# Altium PCB PCB1.PcbDoc (part 2 of 2)
Units mm, origin at the board's own origin, x right, y up, seen from the top; angles counter-clockwise.
Board outline 92.01 x 103.4 mm, 2 copper layers (Top Layer, Bottom Layer), stack 1.569 mm thick; 57 components, 56 nets, 293 pads, 87 vias.
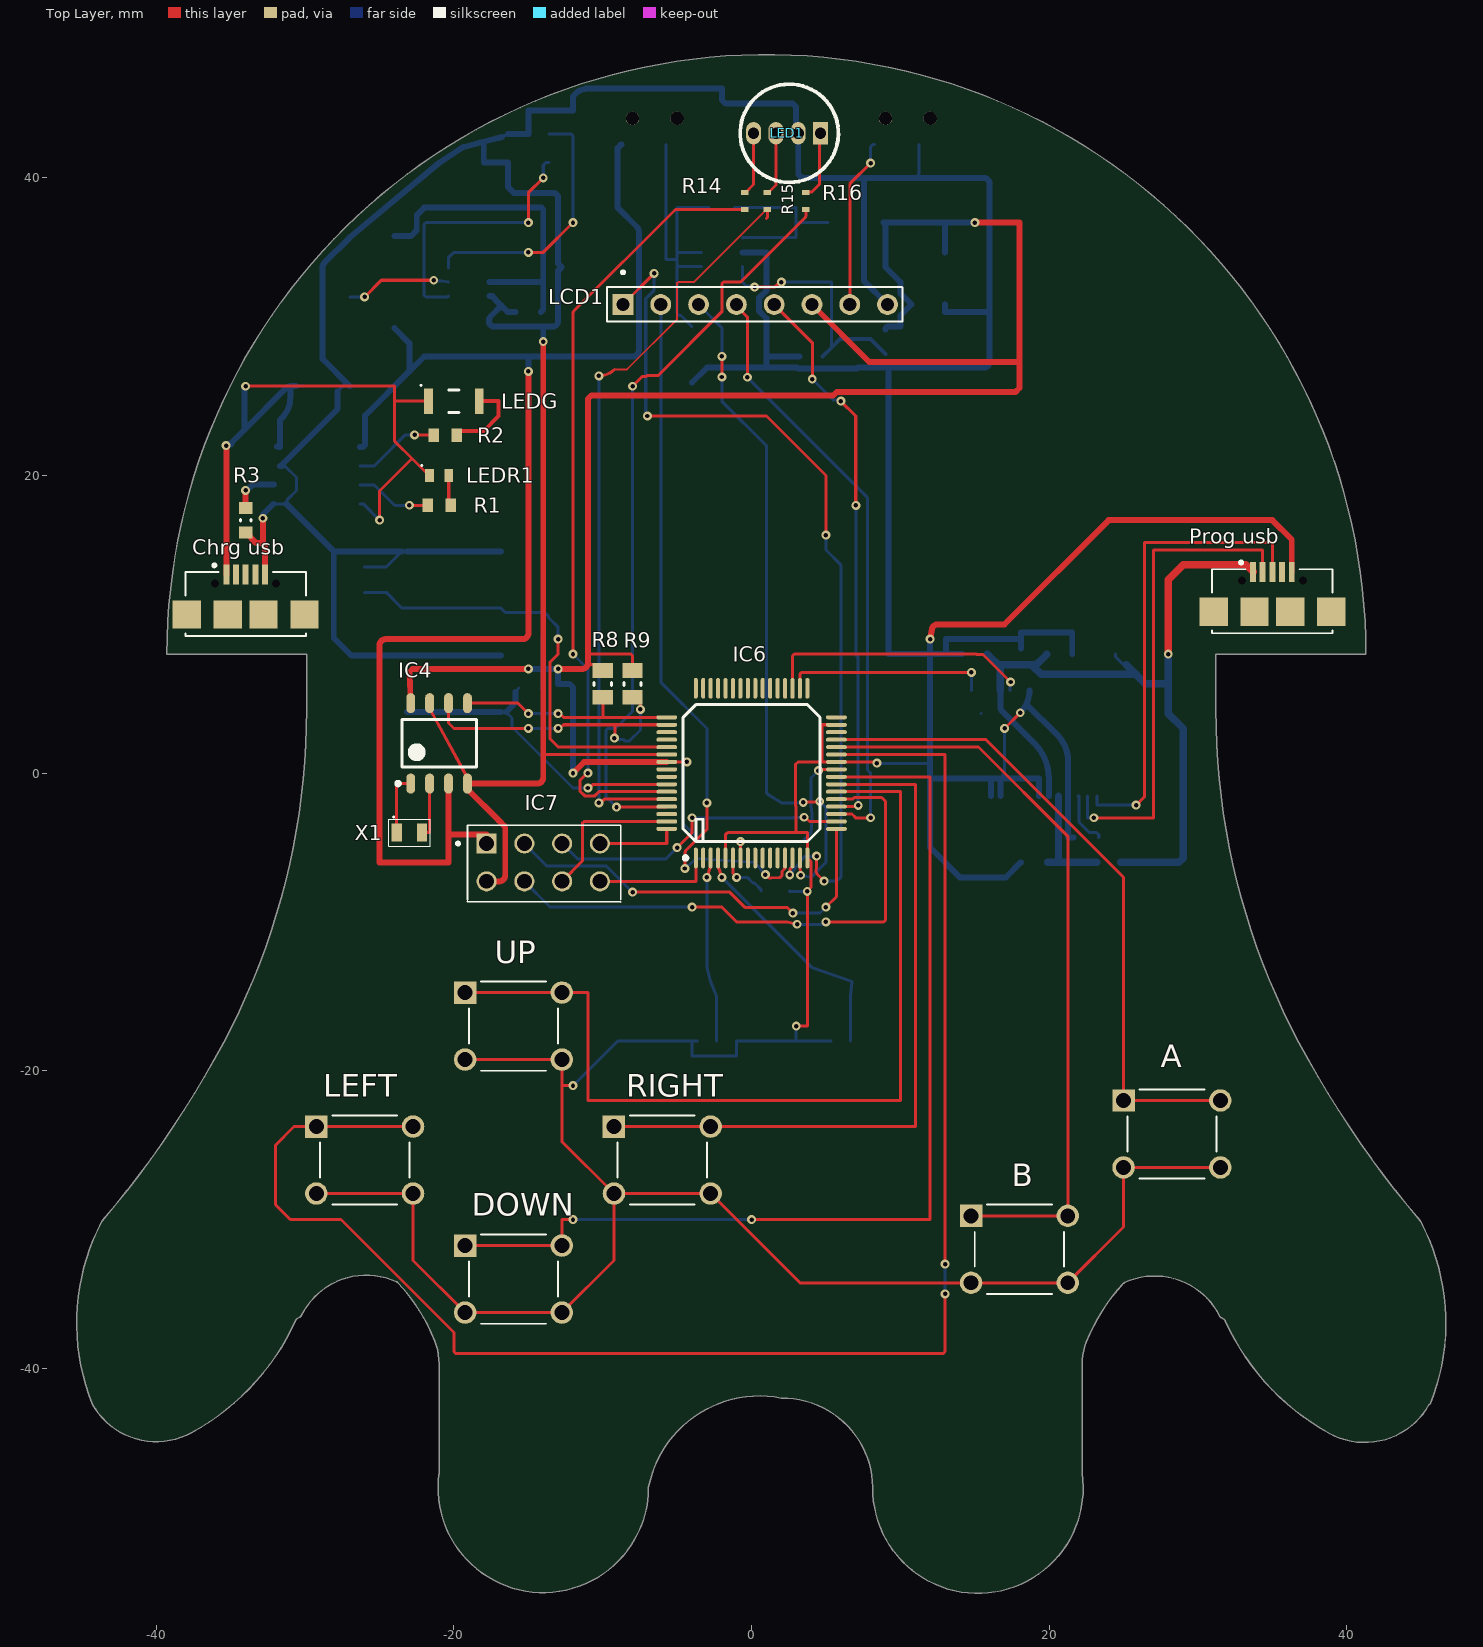
[diagram p0: Top Layer view]

## Part data (continued)
R10: library part RC0805FR-0710KL, "Res SMD 0805 10K 1% 0.125W T.C.100PPM", Case Code (Imperial)=0805, Case Code (Metric)=2012, Manufacturer=Yageo, Max Operating Temperature=155°C, Max Power Dissipation=125mW, Min Operating Temperature=-55°C, Package Quantity=1, Resistance=10kR, Resistance Tolerance=1%, Resistor Type="Thick Film", Supplier Part Number 1=6185163, Temperature Coefficient=100ppm/°C, Voltage Rating=150V, Case/Package=0805, Category=Resistors, ComponentLink1Description=https://datasheet.ciiva.com/11808/0900766b8106beab-11808151.pdf?src-supplier=RSComponents, ComponentLink1URL=https://datasheet.ciiva.com/11808/0900766b8106beab-11808151.pdf?src-supplier=RSComponents, ComponentLink2Description=https://datasheet.ciiva.com/12669/rc0805-12669688.pdf?src-supplier=Mouser, ComponentLink2URL=https://datasheet.ciiva.com/12669/rc0805-12669688.pdf?src-supplier=Mouser, ComponentLink3Description=https://datasheet.ciiva.com/46447/444164-46447563.pdf?src-supplier=Element14, ComponentLink3URL=https://datasheet.ciiva.com/46447/444164-46447563.pdf?src-supplier=Element14, ComponentLink4Description=https://datasheet.ciiva.com/2456/pyu-r-int-thick-7-2456972.pdf?src-supplier=Digi-Key, ComponentLink4URL=https://datasheet.ciiva.com/2456/pyu-r-int-thick-7-2456972.pdf?src-supplier=Digi-Key, ComponentLink5Description=https://datasheet.ciiva.com/2456/pyu-r-int-thick-7-2456973.pdf?src-supplier=Digi-Key, ComponentLink5URL=https://datasheet.ciiva.com/2456/pyu-r-int-thick-7-2456973.pdf?src-supplier=Digi-Key, ComponentLink6Description=https://datasheet.ciiva.com/2456/pyu-r-int-thick-7-2456974.pdf?src-supplier=Digi-Key, ComponentLink6URL=https://datasheet.ciiva.com/2456/pyu-r-int-thick-7-2456974.pdf?src-supplier=Digi-Key, ComponentLink7Description=https://datasheet.ciiva.com/16747/rc0805-16747087.pdf?src-supplier=Future+Electronics, ComponentLink7URL=https://datasheet.ciiva.com/16747/rc0805-16747087.pdf?src-supplier=Future+Electronics, Construction=Rectangular, Depth=1.25mm, Features="Moisture Resistant", Height=0.024inch, Lead Free="Lead Free", Length=2mm, Manufacturer Part Number=RC0805FR-0710KL, Military Standard=Not, Number of Terminations=2, Packaging="Tape and Reel", Power Rating=125mW, Pricing 1="5000=0,00700 (USD)", REACH SVHC=Unknown, RoHS=Yes, RoHS Compliant=Yes, Series=RC, Size Code=0805, Stock 1=435000, Supplier 1=RSComponents, Technology="THICK FILM", Termination=SMD/SMT, Tolerance=1%, Width=0.049inch
R11 R12 R13: library part PCF0603P-R-4K7-BT1, "Surface Mount Metal Film Resistor, Pcf Series, 4.7 Kohm, 63 Mw, - 0.1%, 75 V Rohs Compliant: Yes", Case Code (Imperial)=0603, Case Code (Metric)=1608, Manufacturer="TT Welwyn", Power Rating=63mW, Resistance=4.7kR, Resistor Type="Thin Film", Supplier Part Number 1=61M8292, Temperature Coefficient=25ppm/°C, Tolerance=0.1%, Voltage Rating=75V, Case/Category=0603, Category="Chip SMD Resistors", ComponentLink1Description=https://datasheet.ciiva.com/7860/3754-7860191.pdf?src-supplier=Element14, ComponentLink1URL=https://datasheet.ciiva.com/7860/3754-7860191.pdf?src-supplier=Element14, ComponentLink2Description=https://datasheet.ciiva.com/6093/3754-6093381.pdf?src-supplier=Farnell, ComponentLink2URL=https://datasheet.ciiva.com/6093/3754-6093381.pdf?src-supplier=Farnell, Manufacturer Part Number=PCF0603P-R-4K7-BT1, Packaging="Cut Tape", Pricing 1="10=0,17900 (USD)", REACH SVHC="No SVHC", RoHS=Yes, Stock 1=1027, Supplier 1=Newark, Voltage Rating (DC)=75V
R14 R15 R16: library part CRG0402F270R, "Res Thick Film 0402 270 Ohm 1% 0.063W(1/16W) ±100ppm/C Pad SMD T/R", Case Code (Imperial)=0402, Case Code (Metric)=1005, Manufacturer="TE Connectivity", Max Operating Temperature=125°C, Max Power Dissipation=63mW, Min Operating Temperature=-55°C, Number of Resistors=1, Package Quantity=10000, Resistance Tolerance=1%, Resistor Type="Thick Film", Supplier Part Number 1=95W7454, Temperature Coefficient=100ppm/°C, Voltage Rating=50V, Case/Package=0402, Category="Chip SMD Resistors", ComponentLink1Description=https://datasheet.ciiva.com/11811/0900766b80d0914d-11811952.pdf?src-supplier=RSComponents, ComponentLink1URL=https://datasheet.ciiva.com/11811/0900766b80d0914d-11811952.pdf?src-supplier=RSComponents, ComponentLink2Description=https://datasheet.ciiva.com/12563/eng-ds-1773204-g-12563015.pdf?src-supplier=Mouser, ComponentLink2URL=https://datasheet.ciiva.com/12563/eng-ds-1773204-g-12563015.pdf?src-supplier=Mouser, ComponentLink3Description=https://datasheet.ciiva.com/22706/1610603-22706089.pdf?src-supplier=Element14, ComponentLink3URL=https://datasheet.ciiva.com/22706/1610603-22706089.pdf?src-supplier=Element14, ComponentLink4Description=https://datasheet.ciiva.com/17122/70063020-17122922.pdf?src-supplier=Allied+Electronics, ComponentLink4URL=https://datasheet.ciiva.com/17122/70063020-17122922.pdf?src-supplier=Allied+Electronics, Depth=0.5mm, ELV=Compliant, Height=0.35mm, Length=1mm, Manufacturer Part Number=CRG0402F270R, Mount="Surface Mount", Number of Terminations=2, Packaging="Tape and Reel", Power Rating=63mW, Pricing 1="1=0,00500, 10=0,00400, 25=0,00400, 50=0,00400, 100=0,00400 (USD)", REACH SVHC="No SVHC", Resistance=270R, RoHS=Yes, RoHS Compliant=Yes, Series="CRG, Neohm", Stock 1=50238, Supplier 1=Newark, Technology="THICK FILM", Termination=Solder, Tolerance=1%, Voltage Rating (DC)=50V, Weight=2.3E-05oz, Width=0.5mm
SW1 SW10: library part SK12D07VG3NS, "C&K SK-12D07-VG 3 NS Switches > Slide > Miniature > Mini R/A Slide", Manufacturer="ITT C&K", Package Quantity=1000, Supplier Part Number 1=SK12D07VG3NS-ND, Category=Uncategorized, ComponentLink1Description=http://www.mouser.com/ds/2/60/sk-965380.pdf?src-supplier=Mouser, ComponentLink1URL=http://www.mouser.com/ds/2/60/sk-965380.pdf?src-supplier=Mouser, ComponentLink2Description=https://www.ckswitches.com/media/1432/sk.pdf?src-supplier=Digi-Key, ComponentLink2URL=https://www.ckswitches.com/media/1432/sk.pdf?src-supplier=Digi-Key, Manufacturer Part Number=SK12D07VG3NS, Pricing 1="30000=0,24375 (USD)", RoHS=No, Supplier 1=Digi-Key
SW8 SW9: library part EVQ-PLMA15, "Switch Tactile N.O. SPST Round Button J-Bend 0.02A 15VDC 2.6N SMD Embossed Tape", Contact Current Rating=20mA, Contact Resistance=50mR, Insulation Resistance=50MR, Manufacturer=Panasonic, Max Operating Temperature=70°C, Max Voltage Rating (DC)=15V, Min Operating Temperature=-20°C, Operating Force=2.6N, Package Quantity=1, Supplier Part Number 1=27AC5577, Actuator Length=0.3mm, Actuator Type=Standard, Category="Tactile Switches", ComponentLink1Description=https://datasheet.ciiva.com/8164/atv0000ce2-8164994.pdf?src-supplier=Avnet, ComponentLink1URL=https://datasheet.ciiva.com/8164/atv0000ce2-8164994.pdf?src-supplier=Avnet, ComponentLink2Description=https://datasheet.ciiva.com/16205/atk0000ce3-16205767.pdf?src-supplier=Future+Electronics, ComponentLink2URL=https://datasheet.ciiva.com/16205/atk0000ce3-16205767.pdf?src-supplier=Future+Electronics, ComponentLink3Description=https://datasheet.ciiva.com/17065/70270715-17065721.pdf?src-supplier=Allied+Electronics, ComponentLink3URL=https://datasheet.ciiva.com/17065/70270715-17065721.pdf?src-supplier=Allied+Electronics, ComponentLink4Description=https://datasheet.ciiva.com/2899/atk0000ce3-2899834.pdf?src-supplier=Digi-Key, ComponentLink4URL=https://datasheet.ciiva.com/2899/atk0000ce3-2899834.pdf?src-supplier=Digi-Key, ComponentLink5Description=https://datasheet.ciiva.com/2899/atk0000ce3-2899835.pdf?src-supplier=Digi-Key, ComponentLink5URL=https://datasheet.ciiva.com/2899/atk0000ce3-2899835.pdf?src-supplier=Digi-Key, ComponentLink6Description=https://datasheet.ciiva.com/2899/atk0000ce3-2899836.pdf?src-supplier=Digi-Key, ComponentLink6URL=https://datasheet.ciiva.com/2899/atk0000ce3-2899836.pdf?src-supplier=Digi-Key, ComponentLink7Description=https://datasheet.ciiva.com/26827/getdatasheetpartid-51835-26827884.pdf?src-supplier=Verical, ComponentLink7URL=https://datasheet.ciiva.com/26827/getdatasheetpartid-51835-26827884.pdf?src-supplier=Verical, Contact Plating=Gold,Silver, Current Rating=20mA, Depth=4.9mm, Electrical Life=200000Cycles, Height=1.5mm, Illumination Type=Non-Illuminated,Illuminated, Lead Free="Lead Free", Length=4.9mm, Manufacturer Part Number=EVQ-PLMA15, Max Current Rating=20mA, Mechanical Life=200000Cycles, Mount="Surface Mount", Orientation=Straight, Packaging="Tape and Reel", Pricing 1="1=0,18600, 5000=0,18600, 10000=0,18000, 25000=0,17700, 50000=0,17500 (USD)", Radiation Hardening=No, REACH SVHC="No SVHC", RoHS=Yes, Stock 1=5000, Supplier 1=Newark, Switch Function=Off-Mom, Switch Travel=0.25mm, Termination=J-Bend, Throw Configuration=SPST, Voltage Rating=15V, Voltage Rating (DC)=15V, Width=4.9mm
X1: library part "X1A0000610003 FC-12M 32.768KHZ 12.5PF", "Crystal, FC-12M, 32.768 Khz, 12.5 Pf", Capacitance=1.25E-11F, Frequency=32.768kHz, Load Capacitance=12.5pF, Manufacturer=Epson, Max Operating Temperature=85°C, Min Operating Temperature=-40°C, Supplier Part Number 1=1907468, ComponentLink1Description=https://datasheet.ciiva.com/48778/1734644-48778297.pdf?src-supplier=Element14, ComponentLink1URL=https://datasheet.ciiva.com/48778/1734644-48778297.pdf?src-supplier=Element14, ComponentLink2Description=https://datasheet.ciiva.com/48778/1734644-48778536.pdf?src-supplier=Element14, ComponentLink2URL=https://datasheet.ciiva.com/48778/1734644-48778536.pdf?src-supplier=Element14, ComponentLink3Description=https://datasheet.ciiva.com/48778/1734644-48778057.pdf?src-supplier=Element14, ComponentLink3URL=https://datasheet.ciiva.com/48778/1734644-48778057.pdf?src-supplier=Element14, Manufacturer Part Number="X1A0000610003 FC-12M 32.768KHZ 12.5PF", Mount="Surface Mount", Number of Pins=2, Packaging="Cut Tape", Pricing 1="1=1,08000, 50=0,92000, 100=0,87600, 250=0,81700, 500=0,77000 (GBP)", REACH SVHC=Unknown, RoHS=Yes, Stock 1=2323, Supplier 1=Farnell
X2: library part HC49SM-11.0592-30-50-60-16-ATF, "Crystal 11.0592MHz 16pF 2-Pin HC-49/U Loose", Case/Package=SMD/SMT, Frequency Stability=50ppm, Frequency Tolerance=30ppm, Load Capacitance=16pF, Manufacturer=Multicomp, Max Operating Temperature=60°C, Min Operating Temperature=-10°C, Supplier Part Number 1=33P6975, Accuracy=30ppm, Category=Crystals, ComponentLink1Description=https://datasheet.ciiva.com/8049/1661828-8049574.pdf?src-supplier=Element14, ComponentLink1URL=https://datasheet.ciiva.com/8049/1661828-8049574.pdf?src-supplier=Element14, ComponentLink2Description=https://datasheet.ciiva.com/22697/1661828-22697926.pdf?src-supplier=Element14, ComponentLink2URL=https://datasheet.ciiva.com/22697/1661828-22697926.pdf?src-supplier=Element14, Frequency=11.0592MHz, Manufacturer Part Number=HC49SM-11.0592-30-50-60-16-ATF, Mount="Surface Mount", Number of Pins=2, Packaging="Cut Tape", Pricing 1="1=0,35400, 10=0,34000, 50=0,31600, 100=0,28300, 250=0,26100, 500=0,24300 (USD)", REACH SVHC="No SVHC", RoHS=Yes, Stock 1=597, Supplier 1=Newark

## Via types
v1: diameter 0.6, hole 0.3, Top Layer to Bottom Layer, 87 vias

## Nets (pads, with @x,y where several pads share a name; then routed paths per layer and width w, separated by ;. In a path a pad name is that pad's centre, name@x,y a point inside that pad or via, vN(x,y) a via of type N, cw(c..) or ccw(c..) an arc to the next point about the centre after c; other vN are vias at no path point)
+5V: "Prog usb.1" C8.1 C9.1 C10.2 IC5.4 IC5.20 R11.2 | length 56.2
  Top Layer w0.5: v1(28,8) 28,13 29,14 33.225,14 33.7,13.525
  Bottom Layer w0.203: 16.725,4.358 ccw(c16.928,4.359) 16.784,4.216 ; C10.2 24.45,7.825 24.998,7.277 25.173,7.277
  Bottom Layer w0.403: 16.725,4.358 IC5.4 ; 16.784,4.216 18.999,2.001 cw(c16.646,-0.354) 19.975,-0.354 ; IC5.20 19.975,-0.355
  Bottom Layer w0.5: C8.1@15.85,7.962 C8.1 ; C8.1@15.851,7.962 cw(c15.629,7.514) 15.983,7.867 16.578,7.272 ; IC5.4 16.725,7.125 ccw(c16.371,6.771) 16.724,7.126 16.579,7.271 ccw(c16.225,6.918) 16.578,7.272 ; 19.122,7.272 16.725,7.272 16.578,7.272 ; C9.1@19.85,8 18.975,7.125 19.456,6.644 25.806,6.644 ; R11.2 27,-6 28.707,-6 29,-5.707 29,3 28,4 v1(28,8) ; 25.173,7.277 25.806,6.644 ; 25.856,6.644 25.806,6.644 ; 28,6 26.45,6 25.806,6.644
GND: "Chrg usb.5" "Prog usb.5" A.3 A.4 B.3 B.4 BAT.2 C1.2 C2.2 C3.2 C4.2 C5.2 C6.2 C7.2 C8.2 C9.2 C10.1 C11.2 C12.2 DOWN.3 DOWN.4 IC1.1 IC1.3 IC2.6 IC3.2 IC4.4 IC4.7 IC5.7 IC5.18 IC5.21 IC5.25 IC5.26 IC6.5 IC6.16 IC6.26 IC6.31 IC6.54 IC7.2 LCD1.8 LED1.2 LEFT.3 LEFT.4 Q1.1 Q1.3 R3.1 R5.1 R7.1 R10.1 RIGHT.3 RIGHT.4 SW8.3 SW8.4 SW9.3 SW9.4 SW10.2 UP.3 UP.4 | length 539.7
  Top Layer w0.203: LEFT.3 LEFT.4 -22.75,-32.75 DOWN.3 DOWN.4 -9.25,-32.75 RIGHT.3 ; IC4.7 -21.635,4.325 -19.095,-0.325 IC4.4 IC4.4@-19.095,-1.075 ; UP.3 UP.4 -12.75,-21 ; -16.614,-3.556 cw(c-16.758,-3.699) -16.555,-3.699 ; -14,1.25 IC6.54 ; v1(-12,-21) -12.75,-21 ; IC6.5 -1.75,-4.202 cw(c-1.547,-4.203) -1.548,-4 3,-4 ; v1(3,-17) 3.75,-17 v1@3.75,-7.95 ; v1(3.743,-7.95) 4,-7.693 4,-5.95 3.94,-5.89 IC6.16 3.75,-4 3,-4 ; IC6.31 4.725,3.25 4.725,0.75 ; v1(8.425,0.676) 8.364,0.737 5.713,0.737 IC6.26 4.725,0.75 ; v1(17,3) v1(18.056,4.056) ; A.4 A.3 25,-30.5 B.4 B.3 3.25,-34.25 RIGHT.4 RIGHT.3 ; -12.75,-21 -12.75,-24.75 RIGHT.3 ; 3,-4 3,-2.238 2.943,-2.181 2.943,0.574 3.119,0.75 4.725,0.75
  Top Layer w0.4: IC4.4@-19.095,-1.075 -17,-3.17 -16.614,-3.556 ; IC4.4 -14.4,-0.7 ccw(c-14.4,-0.3) -14,-0.3 -14,1.25 v1(-14,29) ; IC7.2 -16.955,-7.27 ccw(c-16.955,-6.87) -16.555,-6.87 -16.555,-3.699 ; v1(12,9) 12.118,9.669 cw(c12.512,9.6) 12.512,10 17,10 24,17 35,17 36.3,15.7 36.3,13.525
  Top Layer w0.403: R3.1 -33.276,15.451 -32.844,15.451 ; v1(-32.844,17.129) -32.844,15.451 ; -32.7,13.337 -32.7,15.307 -32.844,15.451
  Bottom Layer w0.203: IC1.1@-32.125,18.095 IC1.1 IC1.1@-31.439,18.095 ; IC1.3@-31.344,20.635 -31.353,20.635 -31.348,20.631 -30.581,19.863 -30.581,18.993 -31.209,18.366 -31.209,18.255 -31.369,18.095 IC1.1@-31.439,18.095 ; IC1.1@-31.275,18.095 IC1.1@-31.439,18.095 ; C1.2@-27.823,25.652 -27.475,26 C1.2 ; C12.2 -24.55,13.85 -23.5,14.9 SW9.3 ; Q1.3@-16.773,42.752 Q1.3 ; v1(-12,-21) -9,-18 -4,-18 ; -10.198,45.964 -10.161,46 ; C5.2 -4,-18 ; C11.2 2.557,-7.95 v1(3.743,-7.95) ; v1(3,-17) 3,-18 ; C6.2 3,-18 ; v1(8.425,0.676) 8.45,0.65 12,0.65 12,0.644 ; 11,40 11.25,40.25 SW10.2 ; 12,-0.354 12,-0.31 ; 16.725,-0.354 ccw(c16.061,0.31) 17,0.31 v1(17,3) ; -4,-18 -4,-19 -1,-19 -1,-18 3,-18
  Bottom Layer w0.4: IC1.1@-31.275,18.095 -28.08,14.9 ; C1.2 -28.825,27.825 R5.1 -28.825,34.011 cw(c-28.425,34.009) -28.709,34.291 -27.013,35.987 cw(c-26.73,35.704) -26.986,36.012 -21,41 -19.434,42.046 -19.37,42.063 -18.074,42.407 ; SW9.3@-23.5,14.9 -28.08,14.9 ; SW9.3 SW9.4 ; -18.205,42.372 -18.074,42.407 ; -18,42.372 -18,41.05 Q1.1 -16.375,39.398 -15.977,39 -13.234,39 -13,38.766 -13,34.234 -12.766,34 -13,33.766 -13,30.4 cw(c-13.4,30.4) -13.399,30 -14,30 ; IC2.6 -17.425,32.05 -17.227,31.852 -17.227,31.822 -16.816,31.411 ; -17.054,42.677 -18.013,42.423 ; -17.014,42.688 Q1.3@-16.773,42.752 ; SW8.4 SW8.3 -26.9,7.9 -28.08,9.08 -28.08,14.9 ; Q1.3 -15,42.95 -15,44.54 -12,44.54 -12,45.48 -11.702,45.778 cw(c-11.419,45.495) -11.554,45.872 -11.525,45.882 cw(c-11.39,45.505) -11.506,45.888 -11.193,45.983 cw(c-11.078,45.6) -11.078,46 -10.161,46 -2,46 -2,45.234 -1.766,45 2.766,45 3,44.766 3,43.784 3.02,43.764 LED1.2@3.02,43 ; C2.2 -16.405,31 -16.816,31.411 ; v1(-14,29) -14,30 ; C3.2 -3,27.25 1,27.25 ; IC3.2 1,35 1,32.421 0.493,31.913 0.493,31.063 1,30.556 1,28 ; LED1.2@3.135,43 3.135,40.234 3.369,40 7.565,40 ; R7.1 1,28 ; LCD1.8 7.565,33.062 7.565,40 ; 12,-0.354 16.075,-0.354 ; 12,8 9.206,8 9.206,27.25 ; C4.2 13,31 16,31 ; 13.075,8 13.075,9 18.103,9 ; IC5.26 16.075,-0.354 ; IC5.25 16.725,-0.354 ; C9.2 18.103,9 ; IC5.21 19.325,-0.354 16.725,-0.354 ; C10.1 21.55,9.459 18.103,9.459 18.103,9 ; -18.074,42.407 -18.013,42.423 ; -18.074,42.407 -18.013,42.423 ; -16.816,31.411 -17.544,30.683 ccw(c-17.261,30.4) -17.261,30 -14,30 ; 1,27.25 3.052,27.25 3.125,27.177 7.082,27.177 7.155,27.25 9.206,27.25 ; 1,27.25 1,28 ; 7.565,40 11,40 15.6,40 cw(c15.6,39.6) 16,39.601 16,31 ; 9.206,27.25 15.6,27.25 ccw(c15.6,27.65) 16,27.65 16,31 ; 16.075,-0.354 16.725,-0.354
  Bottom Layer w0.403: v1(-32.844,17.129) -32.844,17.376 IC1.1@-32.125,18.095 ; IC1.3 -31.566,20.635 cw(c-31.173,20.544) -31.459,20.828 -27.823,24.464 C1.2@-27.823,25.652 ; 12,-0.354 12,-5 14,-7 17.1,-7 R10.1 ; 12,-0.31 12,0.644 ; 12,0.65 12,8 ; v1(12,9) 12,8 ; C8.2 13.075,8 12,8 ; v1(18.056,4.056) ccw(c16.563,5.55) 18.469,4.641 ; IC5.7 cw(c16.563,5.55) 18.469,4.641 ; C7.2 21.275,-4.338 IC5.18 21.275,0.783 ccw(c18.735,0.783) 20.531,2.579 18.469,4.641
NetBAT_1: BAT.1 IC1.5 IC4.3 IC7.1 R4.2 SW1.1 | length 97.2
  Top Layer w0.4: IC4.3 -20.365,-4.12 ; IC7.1 -17.81,-4.12 -20.365,-4.12 ; v1(-15,27) -15,9.4 cw(c-15.4,9.4) -15.399,9 -24.601,9 ccw(c-24.6,8.6) -25,8.601 -25,-6 -20.365,-6 -20.365,-4.12
  Bottom Layer w0.4: IC1.5 -26.137,21.905 -25.977,22.065 -25.977,24.023 -23,27 ; R4.2 -23,28.9 -23,27 ; v1(-15,27) -15,28 ; SW1.1 -8.998,42.002 -8.998,39.802 -9,39.8 -9,38 -7.696,36.696 cw(c-7.978,36.413) -7.578,36.413 -7.578,28.4 cw(c-7.978,28.4) -7.978,28 -10,28 -15,28 ; -23,27 -22,28 -15,28
NetC1_1: "Chrg usb.1" C1.1 IC1.4 IC1.8 LEDG.1 LEDR1.1 | length 49.1
  Top Layer w0.203: v1(-34,26) -24,26 -24,25 ; v1(-25,17) -25,18.959 -22.822,21.137 ; LEDG.1 -24,25 ; LEDR1.1 -21.684,20 -22.822,21.137 ; -24,25 -24,22.398 ccw(c-23.797,22.4) -23.941,22.257 -22.822,21.137
  Top Layer w0.4: v1(-35.312,22.003) -35.3,21.992 -35.3,13.337
  Bottom Layer w0.203: v1(-35.312,22.003) -35.236,22.079 -34.996,22.079 ; IC1.4@-31.747,21.952 IC1.4 ; C1.1 C1.1@-30.125,26 ; IC1.8 -26.095,18.095 v1(-25,17)
  Bottom Layer w0.4: IC1.4@-31.887,21.955 cw(c-31.893,21.555) -31.749,21.928 -31.747,21.927 IC1.4@-31.747,21.952
  Bottom Layer w0.403: -34.996,22.079 cw(c-34.607,21.972) -34.893,22.255 -34.074,23.074 ; v1(-34,26) -34.074,25.926 -34.074,23.074 ; IC1.4 -31.7,23.72 -31.591,23.829 ccw(c-33.02,25.257) -31.066,24.744 ccw(c-33.02,25.257) -31,25.257 -31,25.751 C1.1@-31,26 ; C1.1 -30.982,26 -30.983,26 ccw(c-30.982,25.597) C1.1@-31,26 ; -34.074,23.074 -31.259,25.89 -31.25,25.898 cw(c-30.982,25.597) C1.1@-31,26
NetC2_1: C2.1 IC2.5 R4.1 | length 22
  Bottom Layer w0.4: R4.1 -22.875,36.1 -22.502,36.473 -22.502,37.498 -22,38 -14.119,38 -14,37.881 -14,33 ; IC2.5 -14,33 ; C2.1 -14,31.15 -14,33
NetC3_1: C3.1 IC3.4 IC3.5 L1.1 SW1.2 | length 22.4
  Bottom Layer w0.203: SW1.2 -5.75,34.525 -5,34.525 ; C3.1@-4,30 -4.75,30.75 -4.798,30.75 cw(c-4.797,30.953) -5,30.952 -5,34.169 ; IC3.4 -4.881,34.05 -5,34.169 ; IC3.5 -4.881,35 -5,34.881 ; L1.1 -5,38 -5,34.881 ; -5,34.169 -5,34.525 ; -5,34.525 -5,34.881
NetC4_1: C4.1 D1.2 IC4.8 IC6.7 IC6.25 IC6.55 LCD1.6 R6.2 R8.2 R9.2 R12.2 R13.2 | length 153.3
  Top Layer w0.203: -22.991,6.788 cw(c-22.788,6.797) -22.788,7 ; -11,7.4 -10.898,7.298 -10.398,7.298 R8.2 ; -11,8 -8.119,8 -8,7.881 R9.2 ; IC6.55 v1(-4.344,0.749) ; IC6.7 v1(-0.75,-4.598) ; v1(4.491,0.172) 4.556,0.237 5.687,0.237 IC6.25
  Top Layer w0.4: -22.991,6.788 IC4.8 ; -22.788,7 v1(-15,7) ; v1(-13,7) -11.399,7 ccw(c-11.4,7.4) -11,7.4 -11,8 -11,25.139 -10.766,25.373 5.486,25.373 5.74,25.627 17.741,25.627 18,25.886 18,27.618 ; v1(-12,0) -11.25,0.75 IC6.55 ; LCD1.6 7.929,27.618 18,27.618 ; v1(15,37) 18,37 18,27.618
  Bottom Layer w0.203: v1(-4.344,0.749) -4.608,0.485 -4.608,-3.392 -3.402,-4.598 v1(-0.75,-4.598) 3.402,-4.598 3.94,-4.06 4,-4 4.057,-3.184 4.057,-2.746 4,-2.202 4,-0.319 4.06,-0.259 v1(4.491,0.172)
  Bottom Layer w0.4: v1(-15,7) -14,7 ; R12.2 -14,5.747 -14,7 ; R13.2 -14,7 ; v1(-12,0) -12,5.766 -12.234,6 -13,6 v1(-13,7) -14,7 ; D1.2 D1.2@9,37 ; R6.2 cw(c9.175,29.825) 9.175,30 10,30 10,30.75 10.75,31.5 10,32.25 10,33 9,34 D1.2@9,37 ; C4.1 13,37 ; v1(15,37) 13,37 ; D1.2@9,37 13,37
NetC5_1: C5.1 IC6.3 X2.2 | length 12.4
  Top Layer w0.203: v1(-3,-7) -2.75,-6.265 IC6.3
  Bottom Layer w0.203: v1(-3,-7) -3,-13.052 X2.2 -2.37,-14.948 -2.37,-17.802 C5.1
NetC6_1: C6.1 IC6.4 X2.1 | length 16.8
  Top Layer w0.203: IC6.4 -2.25,-6.265 v1(-2,-7)
  Bottom Layer w0.203: v1(-2,-7) 4.052,-13.052 X2.1 6.655,-14.948 6.655,-17.802 C6.1
NetC7_1: C7.1 IC5.17 | length 3.7
  Bottom Layer w0.203: IC5.17 22.004,-1.55 22.004,-3.295 22.699,-3.989 23.182,-3.989 23.33,-4.138 C7.1
NetC11_1: C11.1 IC6.6 | length 3.5
  Top Layer w0.203: IC6.6 -1.25,-6.75 v1(-1,-7)
  Bottom Layer w0.203: v1(-1,-7) -0.293,-7 0.096,-7.389 0.196,-7.389 0.644,-7.837 C11.1
NetC12_1: C12.1 IC6.53 R13.1 SW9.1 SW9.2 | length 29.8
  Top Layer w0.203: v1(-13,9) -13,8 -13.539,7.461 -13.539,2.292 -12.997,1.75 IC6.53
  Bottom Layer w0.203: C12.1 -24.55,12.15 -23.5,11.1 SW9.1 SW9.2 -16.55,10.8 R13.1 -13.9,10.8 -13.652,10.552 -13.652,10.452 -13,9.8 v1(-13,9)
NetD1_1: D1.1 IC3.1 L1.2 | length 12
  Bottom Layer w0.203: L1.2 3,38 3,37 ; IC3.1 -0.625,36 3,36 3,37 ; D1.1 3,37
NetIC1_2: IC1.2 R3.2 | length 3.3
  Top Layer w0.4: R3.2 v1(-34,19)
  Bottom Layer w0.203: v1(-34,19) v1@-33.919,19
  Bottom Layer w0.4: v1@-33.919,19 -33.532,19.387 IC1.2@-32.083,19.387
NetIC1_6: IC1.6 R2.1 | length 5.8
  Top Layer w0.203: v1(-22.644,22.731) -21.389,22.731 R2.1
  Bottom Layer w0.203: IC1.6 -25.365,20.635 -25,21 -23.269,22.731 v1(-22.644,22.731)
NetIC1_7: IC1.7 R1.1 | length 5.1
  Top Layer w0.203: v1(-23,18) R1.1
  Bottom Layer w0.203: IC1.7 -25.449,19.365 cw(c-25.449,19.162) -25.306,19.306 -24.059,18.059 ccw(c-23.916,18.203) -23.916,18 v1(-23,18)
NetIC2_1: IC2.1 Q1.6 | length 18.2
  Top Layer w0.203: v1(-15,37) -15,39 v1(-14,40)
  Bottom Layer w0.203: IC2.1 -20.425,32 -21.881,32 -22,32.119 -22,36.881 -21.881,37 v1(-15,37) ; v1(-14,40) -14,40.852 -13.802,41.05 Q1.6
NetIC2_2: IC2.2 R5.2 | length 7.1
  Top Layer w0.203: v1(-26,32) -24.878,33.122 v1(-21.361,33.122)
  Bottom Layer w0.203: R5.2@-27,32 v1(-26,32) ; v1(-21.361,33.122) -21.3,33.061 -20.773,33.061 -20.773,33.064 IC2.2
NetIC2_3: IC2.3 Q1.4 | length 17.5
  Top Layer w0.203: v1(-15,35) -14,35 v1(-12,37)
  Bottom Layer w0.203: IC2.3 -20.375,34.625 -20,35 v1(-15,35) ; Q1.4 -12.119,42.95 -12,42.831 v1(-12,37)
NetIC3_3: IC3.3 R6.1 R7.2 | length 16.9
  Top Layer w0.203: v1(0.208,32.658) 1.551,32.658 1.893,33 v1(2,33)
  Bottom Layer w0.203: IC3.3 -0.625,33 -0.359,32.734 0.132,32.734 v1(0.208,32.658) ; v1(2,33) 5.363,33 5.363,28.588
  Bottom Layer w0.254: R7.2 5.363,28.588 5.95,29.175 8,29.175 R6.1
NetIC4_1: IC4.1 X1.1 | length 4.2
  Top Layer w0.203: X1.1 -23.85,-0.7 IC4.1
NetIC4_2: IC4.2 X1.2 | length 3.8
  Top Layer w0.203: X1.2 -21.635,-4 IC4.2
NetIC4_5: IC4.5 IC6.49 R8.1 | length 15.1
  Top Layer w0.203: IC4.5 -15.7,4.7 v1(-15,4) ; v1(-13,4) -12.893,4 -12.643,3.75 IC6.49 ; R8.1 -10,3.786 -9.978,3.764
  Bottom Layer w0.203: v1(-15,4) v1(-13,4)
NetIC4_6: IC4.6 IC6.50 R9.1 | length 21.8
  Top Layer w0.203: IC4.6 -20.365,3.365 -20,3 v1(-15,3) ; v1(-13,3) -12.893,3 -12.643,3.25 -9.171,3.25 ; v1(-9.216,2.35) -9.171,2.395 -9.171,3.25 ; R9.1 -7.87,5.1 -7.471,4.702 v1(-7.471,4.279) ; IC6.50 -9.171,3.25
  Bottom Layer w0.203: v1(-15,3) v1(-13,3) ; v1(-9.216,2.35) -9.14,2.274 -8.627,2.274 -8.524,2.171 -8.201,2.171 -7.471,2.901 v1(-7.471,4.279)
NetIC5_1: IC5.1 IC6.34 | length 13.7
  Top Layer w0.203: IC6.34 3.25,6.572 cw(c3.453,6.572) 3.453,6.775 v1(14.775,6.775)
  Bottom Layer w0.203: IC5.1 v1(14.775,6.775)
NetIC5_5: IC5.5 IC6.35 | length 18.2
  Top Layer w0.203: IC6.35 2.75,7.881 2.869,8 15.096,8 15.142,7.975 15.55,7.975 v1(17.402,6.123)
  Bottom Layer w0.203: IC5.5 17.375,6.096 v1(17.402,6.123)
NetIC5_15: "Prog usb.3" IC5.15 | length 31.7
  Top Layer w0.203: v1(25.845,-2.155) 26.36,-1.64 ccw(c26.216,-1.497) 26.419,-1.497 26.419,15.514 35,15.514 35,13.525
  Bottom Layer w0.203: IC5.15 23.225,-2.155 v1(25.845,-2.155)
NetIC5_16: "Prog usb.2" IC5.16 | length 32.7
  Top Layer w0.203: v1(23,-3) 27,-3 27,15 34.35,15 34.35,13.525
  Bottom Layer w0.203: IC5.16 22.575,-3 v1(23,-3)
NetIC5_19: IC5.19 R10.2 R11.1 | length 7.8
  Bottom Layer w0.5: R10.2 R11.1 ; IC5.19 20.625,-5.982 20.682,-5.982
NetIC6_1: IC6.1 IC7.8 | length 8
  Top Layer w0.203: IC7.8 -3.75,-7.27 IC6.1
NetIC6_13: IC6.13 LCD1.2 | length 48.3
  Top Layer w0.203: v1(-4.488,-6.409) -4.461,-5.316 cw(c-4.258,-5.322) -4.401,-5.178 -3,-3.777 v1(-3,-2) ; v1(0.929,-6.823) 1.158,-7.015 1.215,-7.062 1.297,-7.062 1.926,-7.007 2.038,-6.895 2.038,-6.615 2.239,-6.414 2.239,-6.327 2.25,-6.316 IC6.13
  Bottom Layer w0.203: LCD1.2 -6.101,6.101 -3,3 v1(-3,-2) ; v1(-4.488,-6.409) -3.746,-5.773 cw(c-3.614,-5.928) -3.599,-5.725 0.155,-6.012 cw(c0.139,-6.214) 0.293,-6.082 v1(0.929,-6.823)
NetIC6_14: IC6.14 LCD1.1 | length 60.6
  Top Layer w0.203: LCD1.1 v1(-6.544,33.586) ; v1(-7,24) 1,24 5,20 v1(5,16) ; v1(2.567,-6.834) 2.569,-6.831 2.569,-6.464 2.75,-6.283 IC6.14 ; v1(4.376,-5.579) 4.351,-6.285 4.343,-6.63 4.403,-6.78 v1(4.878,-7.255)
  Bottom Layer w0.203: v1(-7,24) -7.076,24.076 -7.076,24.281 -7.112,24.317 -7.112,31.888 -6.544,32.456 v1(-6.544,33.586) ; v1(2.567,-6.834) 3.502,-5.656 cw(c3.654,-5.791) 3.654,-5.588 4.367,-5.588 v1(4.376,-5.579) ; v1(4.878,-7.255) 5.745,-7.255 6,-7 6,14 5,15 v1(5,16)
NetIC6_15: IC6.15 LCD1.3 | length 46.1
  Top Layer w0.203: v1(-2.002,26.62) v1(-2,28) ; IC6.15 3.25,-6.156 ccw(c3.453,-6.156) 3.25,-6.168 v1(3.293,-6.862) ; v1(3.471,-1.962) 3.505,-1.928 4.548,-1.928 v1(4.582,-1.894)
  Bottom Layer w0.203: LCD1.3 -2,29.927 v1(-2,28) ; v1(-2.002,26.62) v1(-2.002,26.62) -2,25 1,22 1,-1.261 ccw(c1.203,-1.261) 1.096,-1.433 2,-2 2.765,-2 v1(3.471,-1.962) ; v1(3.293,-6.862) 3.895,-6.98 ccw(c3.933,-6.78) 4.076,-6.924 4.94,-6.06 ccw(c4.797,-5.916) 5,-5.916 5,-2.331 4.582,-1.912 v1(4.582,-1.894)
NetIC6_17: IC6.17 IC7.3 | length 27.9
  Top Layer w0.203: v1(-8,-8) -1.457,-8 -0.419,-9.038 2.409,-9.038 v1(2.776,-9.406) ; v1(5,-9) 5.7,-8.3 IC6.17
  Bottom Layer w0.203: IC7.3 -13.749,-6.251 -9.749,-6.251 v1(-8,-8) ; v1(2.776,-9.406) 4.594,-9.406 v1(5,-9)
NetIC6_18: IC6.18 IC7.5 | length 20.7
  Top Layer w0.203: v1(-5,-5) -4,-4 v1(-4,-3) ; v1(3.529,-2.965) 3.612,-2.965 3.897,-3.25 IC6.18
  Bottom Layer w0.203: IC7.5 -11.705,-5.755 -5.755,-5.755 v1(-5,-5) ; v1(-4,-3) 2.799,-3 2.81,-3 2.822,-2.999 v1(3.529,-2.965)
NetIC6_19: IC6.19 LCD1.4 | length 40.6
  Top Layer w0.203: LCD1.4 -1.021,31.387 -0.286,30.652 v1(-0.286,26.605) ; IC6.19 6.75,-2.75 7,-3 v1(8,-3)
  Bottom Layer w0.203: v1(-0.286,26.605) 7.735,18.568 cw(c7.591,18.425) 7.794,18.425 7.794,0.206 8,0 v1(8,-3)
NetIC6_20: IC6.20 LCD1.5 | length 37.8
  Top Layer w0.203: LCD1.5 1.519,31.481 4.079,28.921 v1(4.079,26.48) ; IC6.20 5.713,-2.237 7.097,-2.237 v1(7.167,-2.167) ; v1(6,25) 7,24 7,18 v1(7.01,17.99)
  Bottom Layer w0.203: v1(4.079,26.48) 5.483,25.076 5.924,25.076 v1(6,25) ; v1(7.01,17.99) 7.01,7.952 7.167,7.795 v1(7.167,-2.167)
NetIC6_21: IC6.21 IC7.4 | length 37
  Top Layer w0.203: v1(-4,-9) -2,-9 -1,-10 2.354,-10 cw(c2.354,-10.203) 2.4,-10.005 v1(3.059,-10.157) ; v1(5,-10) 8.881,-10 9,-9.881 9,-2 9,-1.896 8.742,-1.639 6.896,-1.639 6.785,-1.75 IC6.21
  Bottom Layer w0.203: IC7.4 -13.54,-9 v1(-4,-9) ; v1(3.059,-10.157) 4.843,-10.157 v1(5,-10)
NetIC6_22: IC6.22 UP.1 UP.2 | length 61.5
  Top Layer w0.203: UP.1 UP.2 -11,-14.75 -11,-22 10,-22 10,-1.25 IC6.22
NetIC6_23: IC6.23 RIGHT.1 RIGHT.2 | length 48.6
  Top Layer w0.203: RIGHT.1 RIGHT.2 11,-23.75 11,-0.75 IC6.23
NetIC6_24: DOWN.1 DOWN.2 IC6.24 | length 69
  Top Layer w0.203: DOWN.1 DOWN.2 -12.75,-30 v1(-12,-30) ; v1(0,-30) 12,-30 12,-0.25 IC6.24
  Bottom Layer w0.203: v1(-12,-30) v1(0,-30)
NetIC6_27: IC6.27 LEFT.1 LEFT.2 | length 111.1
  Top Layer w0.203: LEFT.2 LEFT.1 -30.75,-23.75 -32,-25 -32,-29 -31,-30 -27.592,-30 -20,-37.592 -20,-38.881 -19.881,-39 12.881,-39 13,-38.881 v1(13,-35) ; IC6.27 13,1.25 v1(13,-33)
  Bottom Layer w0.203: v1(13,-35) v1(13,-33)
NetIC6_28: B.1 B.2 IC6.28 | length 50
  Top Layer w0.203: IC6.28 15.25,1.75 21.25,-4.25 B.2 B.1
NetIC6_29: A.1 A.2 IC6.29 | length 44.6
  Top Layer w0.203: IC6.29 15.75,2.25 25,-7 A.1 A.2
NetIC6_58: IC6.58 R12.1 SW8.1 SW8.2 | length 22
  Top Layer w0.203: v1(-11,-1) -10.893,-1 -10.643,-0.75 IC6.58
  Bottom Layer w0.203: SW8.2 -16.5,4.1 -16.102,3.702 -16.102,3.102 -12,-1 v1(-11,-1) ; R12.1@-15.879,5.468 R12.1
  Bottom Layer w0.4: SW8.1 SW8.2 ; SW8.2@-16.5,4.1 -15.879,4.721 R12.1@-15.879,5.468
NetIC6_59: IC6.59 R14.1 | length 53.3
  Top Layer w0.203: v1(-12,8) -12,30.917 cw(c-11.797,30.916) -11.941,31.059 -5.184,37.816 cw(c-5.04,37.672) -5.041,37.876 ; v1(-11,0) -11.058,0 -11.529,-0.47 -11.529,-1.219 -11.219,-1.529 -10.532,-1.529 -10.254,-1.25 IC6.59 ; -5.04,37.876 R14.1
  Bottom Layer w0.203: v1(-12,8) -11,7 v1(-11,0)
NetIC6_60: IC6.60 R15.1 | length 51.3
  Top Layer w0.127: -9.215,27.124 -8.375,27.124 -5,30.499 -5,32.926 -4.926,33 -3.888,33 0.988,37.876 R15.1
  Top Layer w0.203: v1(-10.256,-2) -10.149,-2 -9.899,-1.75 IC6.60 ; v1(-10.256,26.697) -10.254,26.697 ccw(c-10.252,28.169) -9.215,27.124 ; 1.002,37.281 1.061,37.341 1.061,37.424 R15.1
  Bottom Layer w0.203: v1(-10.256,-2) v1(-10.256,26.697)
NetIC6_61: IC6.61 R16.1 | length 51
  Top Layer w0.203: v1(-9.076,-2.286) -9.053,-2.263 -5.713,-2.263 IC6.61 ; v1(-8,26) -7.349,26.651 -7.163,26.651 ccw(c-7.163,26.854) -7.019,26.71 -6.29,26.71 -2,31 -2,32.881 -1.881,33 -0.729,33 3.588,37.318 ccw(c3.444,37.461) 3.647,37.461 R16.1
  Bottom Layer w0.203: v1(-9.076,-2.286) -9.784,-1.578 -9.784,2.881 -9.665,3 -9.152,3 -8,4.152 v1(-8,26)
NetIC6_63: IC6.63 IC7.6 | length 10.2
  Top Layer w0.203: IC7.6 -11.37,-5.91 -11.37,-3.369 -11.251,-3.25 IC6.63
NetIC6_64: IC6.64 IC7.7 | length 5.5
  Top Layer w0.203: IC7.7 -5.7,-4.73 IC6.64
NetLCD1_7: LCD1.7 SW10.1 | length 11.5
  Top Layer w0.203: LCD1.7 6.599,39.599 v1(8,41)
  Bottom Layer w0.203: v1(8,41) 8,42 cw(c8.25,42) SW10.1
NetLED1_1: LED1.1 R16.2 | length 4.6
  Top Layer w0.203: R16.2 3.683,39.061 4.061,39.061 4.564,39.564 4.564,42.929 LED1.1@4.635,43
NetLED1_3: LED1.3 R15.2 | length 4.3
  Top Layer w0.127: R15.2@1.031,39.057 R15.2@1.169,39.057
  Top Layer w0.203: R15.2@1.169,39.057 1.635,39.523 LED1.3@1.635,43
NetLED1_4: LED1.4 R14.2 | length 4.3
  Top Layer w0.203: R14.2 -0.393,39.026 0.135,39.553 LED1.4@0.135,43
NetLEDG_2: LEDG.2 R2.2 | length 5.2
  Top Layer w0.254: R2.2@-19.516,23 -18,23 -17,24 -17,25 LEDG.2
NetLEDR1_2: LEDR1.2 R1.2 | length 2.1
  Top Layer w0.203: LEDR1.2 -20.35,18.125 R1.2
pads on no net: "Chrg usb.2" "Chrg usb.3" "Chrg usb.4" "Chrg usb." "Chrg usb.S1" "Chrg usb.S2" "Chrg usb.S3" "Chrg usb.S4" "Prog usb.4" "Prog usb." "Prog usb.S1" "Prog usb.S2" "Prog usb.S3" "Prog usb.S4" IC1.9 IC2.4 IC3.6 IC5.2 IC5.3 IC5.6 IC5.8 IC5.9 IC5.10 IC5.11 IC5.12 IC5.13 IC5.14 IC5.22 IC5.23 IC5.24 IC5.27 IC5.28 IC6.2 IC6.8 IC6.9 IC6.10 IC6.11 IC6.12 IC6.30 IC6.32 IC6.33 IC6.36 IC6.37 IC6.38 IC6.39 IC6.40 IC6.41 IC6.42 IC6.43 IC6.44 IC6.45 IC6.46 IC6.47 IC6.48 IC6.51 IC6.52 IC6.56 IC6.57 IC6.62 Q1.2 Q1.5 SW1. SW1.3 SW1.S1 SW1.S2 SW1.S3 SW1.S4 SW10. SW10.3 SW10.S1 SW10.S2 SW10.S3 SW10.S4
copper on no net: | length 0
  Bottom Layer w0.203: 15.421,4.003 15.425,4

## Silkscreen, mask and mechanical layers (free items; w line width, h text height)
Mechanical 1:
  lines w0.127: -39.25,8 -30,8 ; -36,-43.25 -37.69,-44.351 -38.427,-44.678 -39.452,-44.902 -40.413,-44.948 -41.224,-44.799 -41.69,-44.631 -42.623,-44.193 -43.219,-43.755 -43.611,-43.344 -44.097,-42.765 -44.368,-42.209 -44.593,-41.609 -44.788,-40.933 -44.968,-40.287 -45.148,-39.476 -45.299,-38.26 -45.359,-37.554 -45.349,-36.185 -45.238,-35.284 -45.044,-34.079 -44.781,-32.901 -44.476,-31.986 -43.842,-30.463 -43.395,-29.724 -41.994,-28.077 -41.147,-26.999 -40.054,-25.505 -39.038,-24.027 -37.914,-22.303 -37.252,-21.271 -36.313,-19.639 -35.389,-17.93 -34.296,-15.728 -33.541,-14.019 -32.818,-12.218 -32.14,-10.231 -31.509,-8.045 -30.954,-5.751 -30.57,-3.795 -30.231,-1.286 -29.969,1.856 -29.892,3.934 -29.861,8.03 ; -21,-48.5 -21,-39 ; 22.25,-49 22.25,-39.5 22.5,-38.25 cw(c27.211,-38.461) 31.5,-36.5 ccw(c46.55,-29.875) 37.847,-43.827 ccw(c41.128,-39.833) 44.5,-43.75 ccw(c40.54,-39.557) 46.289,-40.012 ccw(c40.322,-38.221) 46.506,-37.462 ccw(c36.681,-35.945) 44.25,-29.5 cw(c100.094,15.313) 37.25,-19 cw(c125.06,26.78) 34.283,-12.793 cw(c82.143,4.616) 32.5,-6.75 cw(c96.244,6.69) 31.25,2.25 31.25,4.25 31.25,6.5 31.25,8 41.25,8
  lines w0.254: -39.25,8 cw(c1,8) 41.25,8 ; -36,-43.25 ccw(c-47.075,-27.992) -30.25,-36.5 cw(c-25.875,-38.625) -23.75,-34.25 cw(c-33.154,-42.865) -21,-39 ; -21,-48.5 ccw(c-14.115,-48.134) -14.75,-55 ccw(c-14.059,-47.974) -7,-48 cw(c0.378,-49.626) -4.835,-44.158 cw(c0.625,-49.375) 2.25,-42 cw(c1.894,-48.347) 8.241,-48.702 ccw(c15.283,-47.978) 17.284,-54.769 ccw(c15.298,-48.038) 22.25,-49

## Text inside footprints (layer, text, board x,y; h text height)
BAT: Bottom Overlay "+" at -12.458,29.588 h0.8 r270; Bottom Overlay "-" at -12.48,32.519 h0.8 r270
"Chrg usb": Mechanical 13 "PCB EDGE" at -28.675,9.337 h0.61
"Prog usb": Mechanical 13 "PCB EDGE" at 40.325,9.525 h0.61